# Altium PCB Zotino_HD68_Adapter.PCBDOC
Units mm, origin at the board's own origin, x right, y up, seen from the top; angles counter-clockwise.
Board outline 44.81 x 100 mm, 4 copper layers (TopLayer, Internal Plane 2, Signal Layer 1, BottomLayer), stack 1.563 mm thick; 5 components, 67 nets, 178 pads, 5 vias.
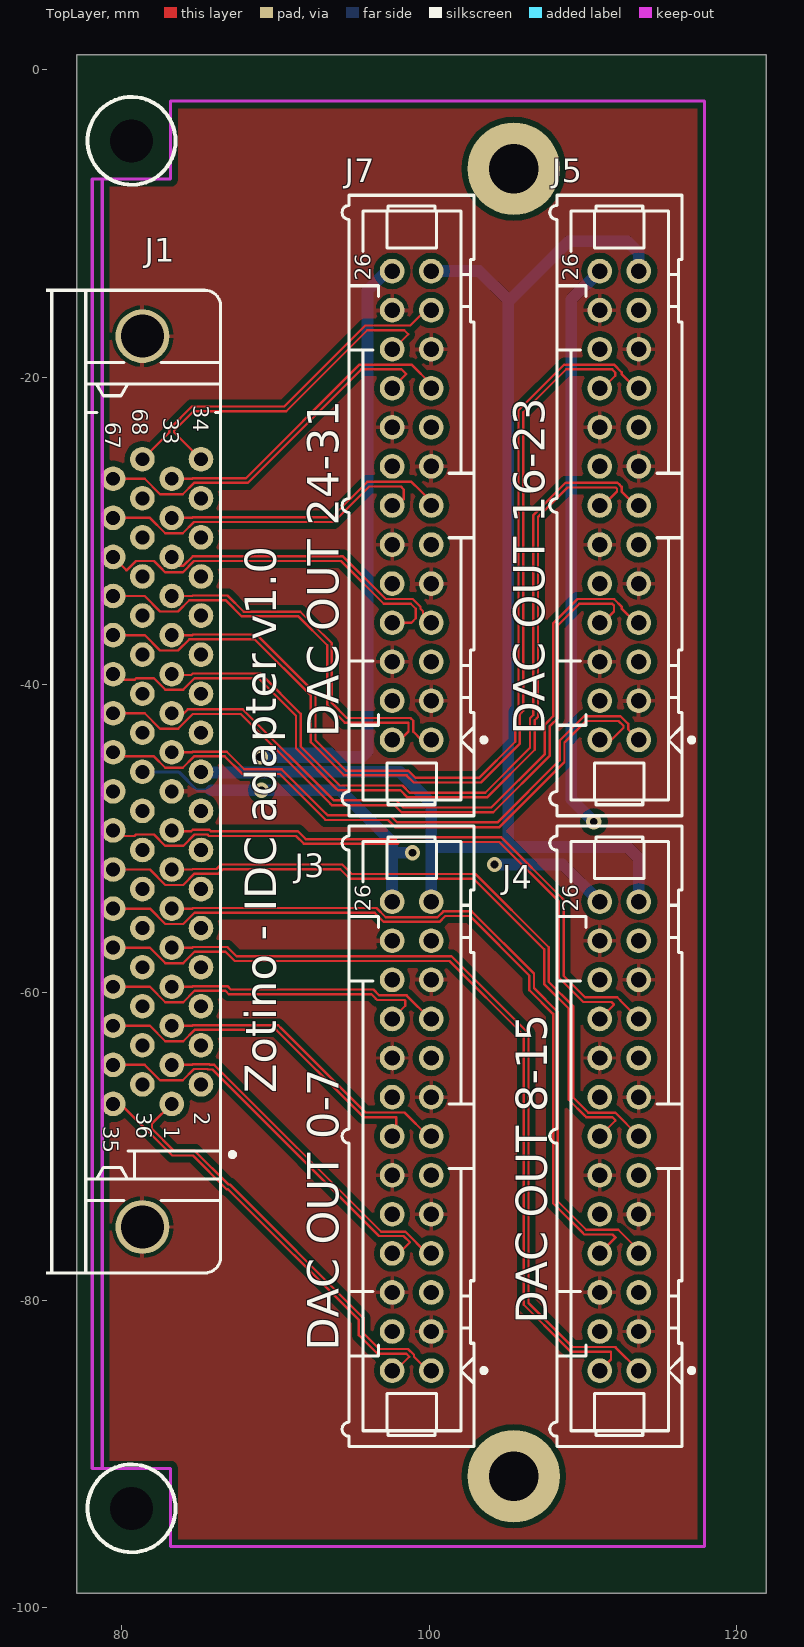
[diagram p0: TopLayer view]
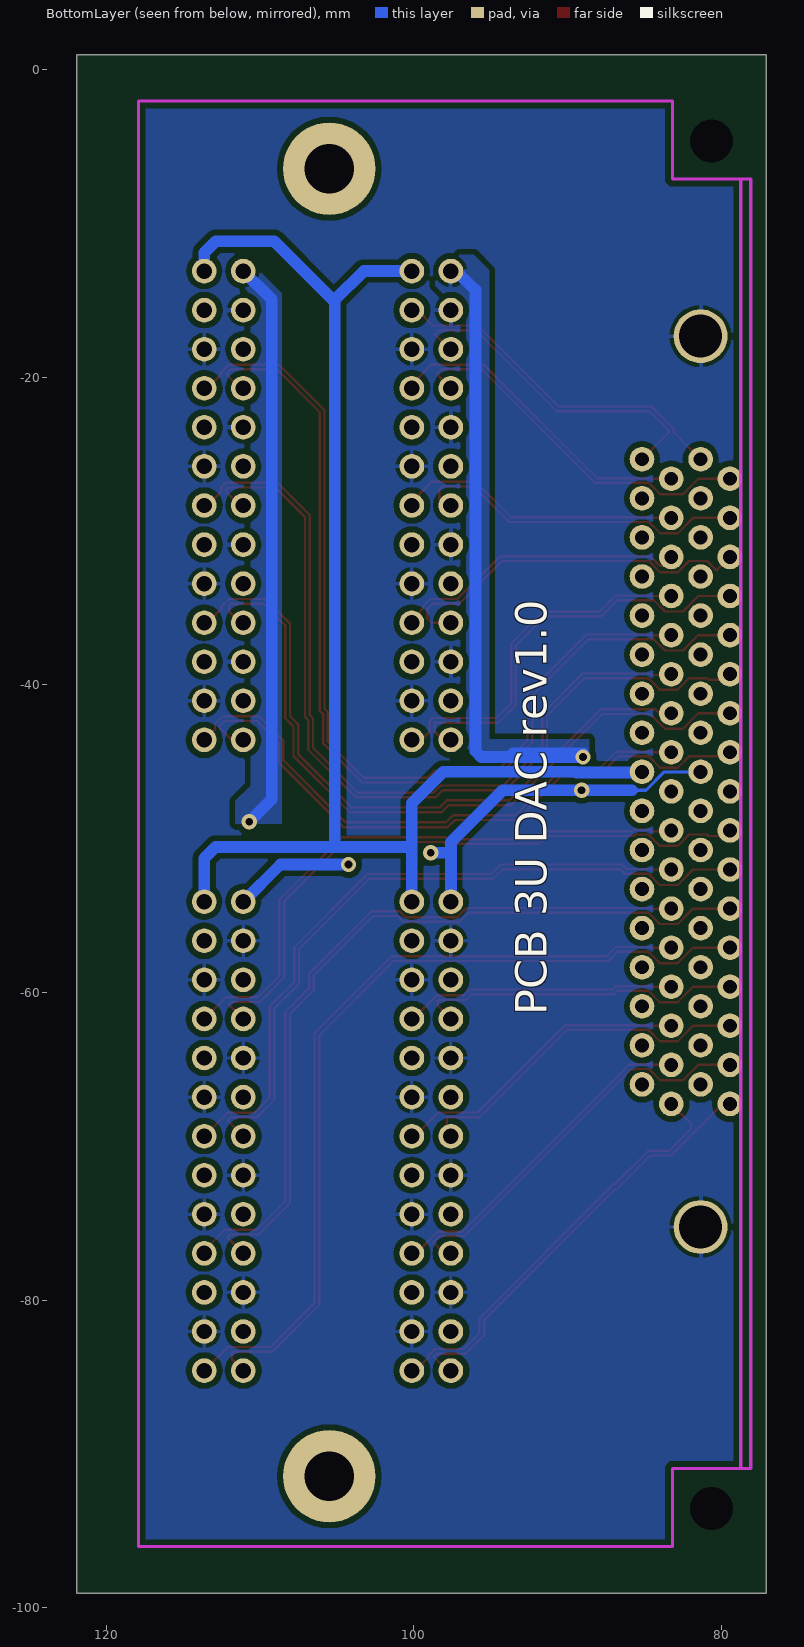
[diagram p1: BottomLayer view, seen from below]
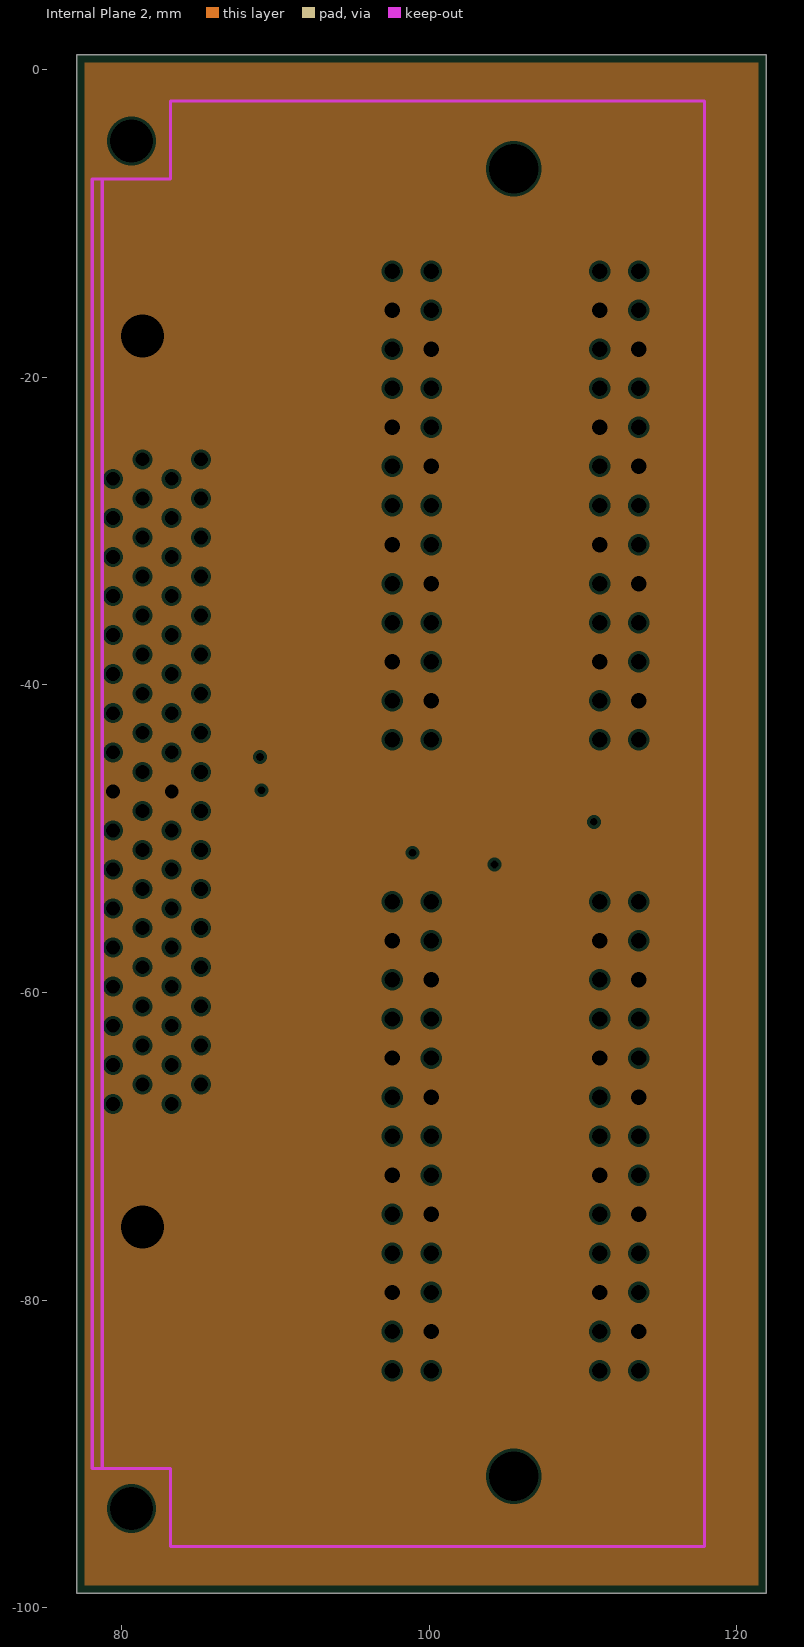
[diagram p2: Internal Plane 2, clearances drawn from the general rule]
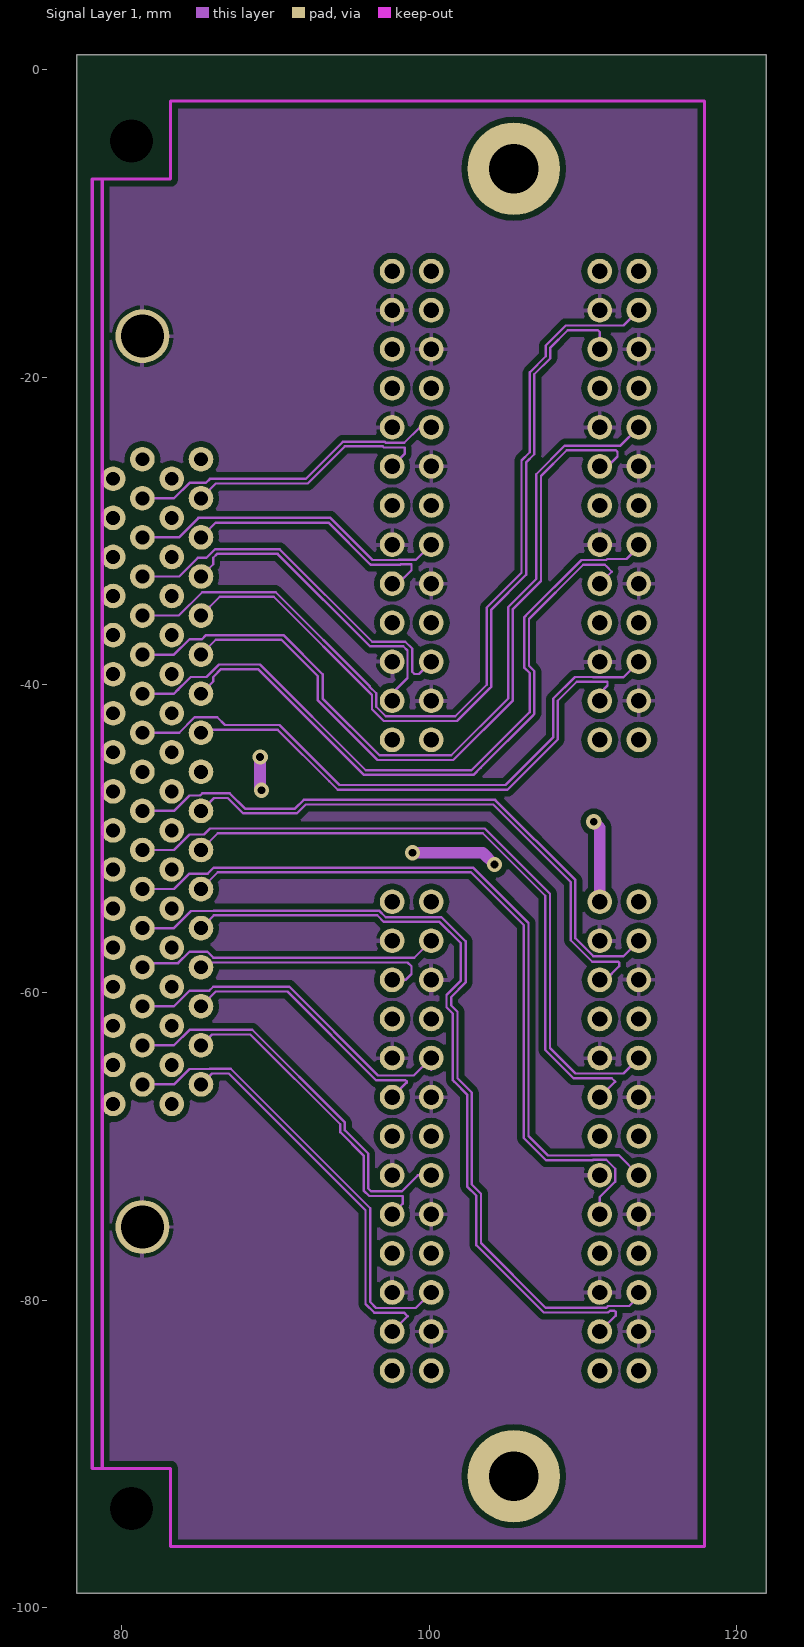
[diagram p3: Signal Layer 1]
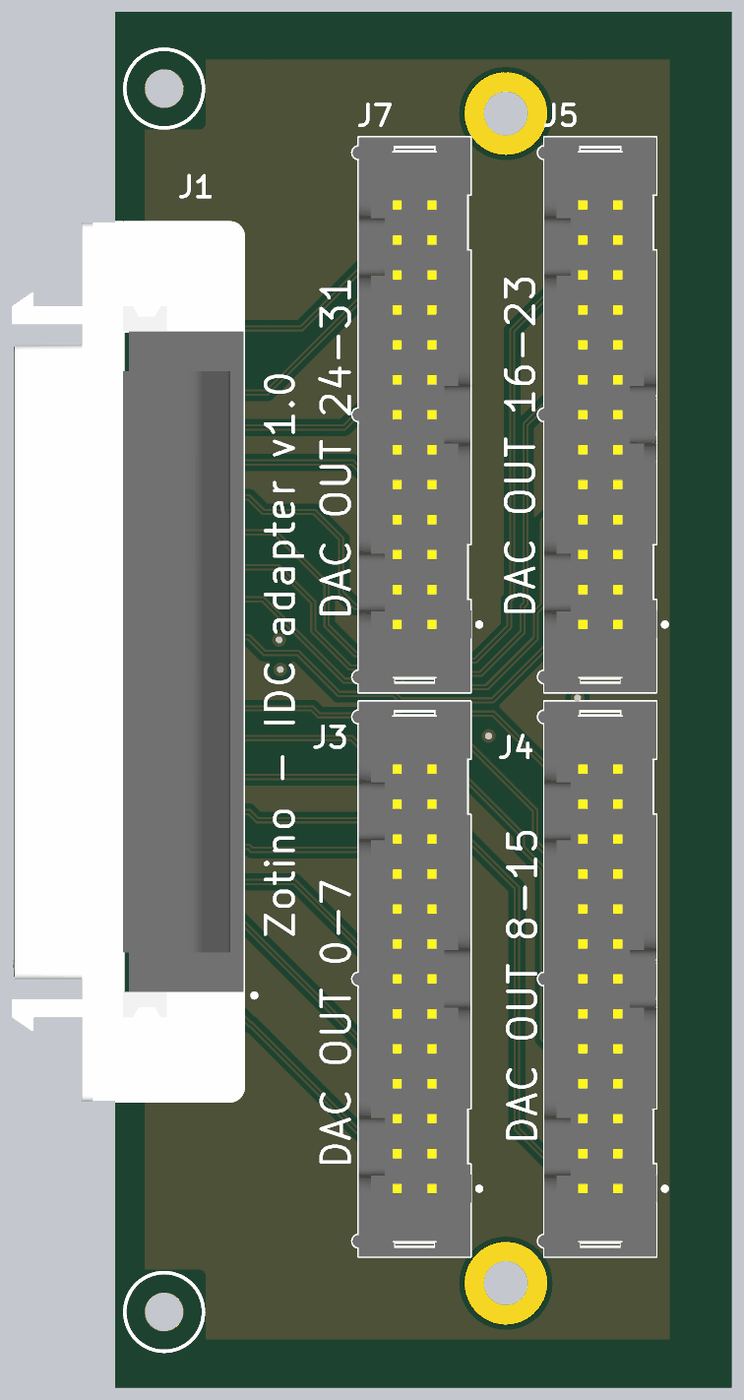
[diagram p4: 3D render of the assembled board from above, using the file's embedded part models]

## Layer stack, top to bottom
TopSolder: solder mask 0.0102, Solder Resist, Dk 3.5
TopLayer: signal copper 0.0356
Dielectric1: core 0.36, FR-4, Dk 4.8
Internal Plane 2: plane copper 0.036, net GND
Dielectric 3: prepreg 0.7, Dk 4.2
Signal Layer 1: signal copper 0.036
Dielectric 5: core 0.36, Dk 4.2
BottomLayer: signal copper 0.0356
BottomSolder: solder mask 0.0102, Solder Resist, Dk 3.5

## Board outline
121.912,0.955 121.912,-99.045 77.103,-99.045 77.103,0.955

## Design rules (kind name [scope] priority, off if disabled: settings)
Clearance Clearance_DIFF [(InDifferentialPairClass('All Differential Pairs')and IsTrack ) vs (InDifferentialPairClass('All Differential Pairs') and IsTrack  )] p1 off: gap=0.508 ignorepadtopadclearanceinfootprint=FALSE except(0: Arc-Hole Track-Hole SMDPad-Hole THPad-Hole Via-Hole Fill-Hole Poly-Hole Region-Hole Text-Hole; 0.127: SMDPad-SMDPad SMDPad-THPad SMDPad-Via SMDPad-Fill SMDPad-Poly SMDPad-Region SMDPad-Text THPad-THPad THPad-Via THPad-Fill THPad-Poly THPad-Region THPad-Text Via-Via Via-Fill Via-Poly Via-Region Via-Text)
Clearance [All] p2: gap=0.127 ignorepadtopadclearanceinfootprint=FALSE except(0: Arc-Hole Track-Hole SMDPad-Hole THPad-Hole Via-Hole Fill-Hole Poly-Hole Region-Hole Text-Hole; 0.381: Arc-Poly Track-Poly SMDPad-Poly THPad-Poly Via-Poly Fill-Poly Poly-Poly)
ComponentClearance [All] p1: gap=0 collisioncheckmode=3 verticalgap=2540 showdistances=FALSE
DiffPairsRouting [All] p1: maxlimit=0.152 minlimit=0.127 mostfreqgap=0.152 toplayer_minwidth=0.127 toplayer_maxwidth=0.152 toplayer_prefwidth=0.152 midlayer1_minwidth=0.127 midlayer1_maxwidth=0.152 midlayer1_prefwidth=0.152 bottomlayer_minwidth=0.127 bottomlayer_maxwidth=0.152 bottomlayer_prefwidth=0.152 maxuncoupledlength=12.7
FabricationTestPointUsage TestPointUsage [All] p1: valid=0 allowmultiple=FALSE
FabricationTestpoint Testpoint [All] p1: side=3 testpointundercomponent=TRUE minsize=1.016 maxsize=2.54 preferedsize=1.524 minholesize=0.508 maxholesize=1.016 preferedholesize=0.813 testpointgrid=0.025 allowsidetop=TRUE allowsidebottom=TRUE usegrid=TRUE gridtolerance=0
Height [All] p1: minheight=0 maxheight=40 prefheight=40
HoleSize [All] p1: absolutevalues=TRUE maxlimit=3.81 minlimit=0.025 maxpercent=80.000 minpercent=20.000
HoleToHoleClearance [All] p1: gap=0.025 allowstackedmicrovias=TRUE
MinimumSolderMaskSliver [All] p1: minsoldermaskwidth=0
PlaneClearance [All] p1: clearance=0.2
PlaneConnect [All] p1: planeconnectstyle=Direct reliefexpansion=0.508 reliefentries=4 reliefconductorwidth=0.254 reliefairgap=0.254
PolygonConnect PolygonConnect_pad [(InPadClass('All Pads'))] p1: connectstyle=Relief reliefconductorwidth=0.254 reliefentries=4 polygonreliefangle="90 Angle" airgapwidth=0.254
PolygonConnect [All] p2: connectstyle=Direct reliefconductorwidth=0.254 reliefentries=4 polygonreliefangle="45 Angle" airgapwidth=0.254
RoomDefinition Zotino_HD68_Adapter [InComponentClass('Zotino_HD68_Adapter')] p1: confinementstyle=ConfineIn formatcopy=TRUE lockcomponents=FALSE outline 120.912,0.705 118.412,0.705 118.412,-15.545 120.912,-15.545
RoutingVias [All] p1: holewidth=0.2 width=0.5 viastyle="Through Hole" minholewidth=0.2 minwidth=0.5 maxholewidth=0.711 maxwidth=1.27
SilkToSilkClearance [All] p1: silktosilkclearance=0
SilkToSolderMaskClearance SilkscreenOverComponentPads [IsPad] p1: minsilkscreentomaskgap=0 clearancetoexposedcopper=TRUE
SolderMaskExpansion [All] p1: expansion=0.051
ViasUnderSMD [All] p1: allowed=FALSE
Width [All] p1: maxlimit=1.27 minlimit=0.127 preferedwidth=0.127
18 further rules are at their usual default settings.

## Components (designator, comment, footprint, x,y, rotation, side; value= is the part's Value field where it differs from the comment)
J1 "D-SUB" TYCO_5787082-7 82.315,-46.289 r270 top
J3 "Header 26" 3M_N2526-6002RB 98.865,-69.339 r90 top
J4 "Header 26" 3M_N2526-6002RB 112.365,-69.339 r90 top
J5 "Header 26" 3M_N2526-6002RB 112.365,-28.339 r90 top
J7 "Header 26" 3M_N2526-6002RB 98.865,-28.339 r90 top

## Footprints (in the part's own frame and the unit in brackets; to place one, negate y for a bottom-side part, rotate by r counter-clockwise, add the part's x,y. Pads: shape width x height; smd on the part's side, far side on the other; paste and mask are expansions set on the pad)
3M_N2526-6002RB [mm] "26 Contacts - Straight .100\" x .100\" Low Profile Four-Wall Header"
  round 1.6 hole 1: 1(-15.24,-1.27) 2(-15.24,1.27) 3(-12.7,-1.27) 4(-12.7,1.27) 5(-10.16,-1.27) 6(-10.16,1.27) 7(-7.62,-1.27) 8(-7.62,1.27) 9(-5.08,-1.27) 10(-5.08,1.27) 11(-2.54,-1.27) 12(-2.54,1.27) 13(0,-1.27) 14(0,1.27) 15(2.54,-1.27) 16(2.54,1.27) 17(5.08,-1.27) 18(5.08,1.27) 19(7.62,-1.27) 20(7.62,1.27) 21(10.16,-1.27) 22(10.16,1.27) 23(12.7,-1.27) 24(12.7,1.27) 25(15.24,-1.27) 26(15.24,1.27)
  silkscreen extent -20.17,-4.85 20.17,4.52, body extent -20.17,-4.11 20.17,4.52, height 9.91
TYCO_5787082-7 [mm] "68 contacts, AMPLIMITE .050\", Right Angled Receptacle Series III"
  round 1.6 hole 0.9: 1(20.955,0.952) 2(19.685,2.858) 3(18.415,0.952) 4(17.145,2.858) 5(15.875,0.952) 6(14.605,2.858) 7(13.335,0.952) 8(12.065,2.858) 9(10.795,0.952) 10(9.525,2.858) 11(8.255,0.952) 12(6.985,2.858) 13(5.715,0.952) 14(4.445,2.858) 15(3.175,0.952) 16(1.905,2.858) 17(0.635,0.952) 18(-0.635,2.857) 19(-1.905,0.952) 20(-3.175,2.857) 21(-4.445,0.952) 22(-5.715,2.857) 23(-6.985,0.952) 24(-8.255,2.857) 25(-9.525,0.952) 26(-10.795,2.857) 27(-12.065,0.952) 28(-13.335,2.857) 29(-14.605,0.952) 30(-15.875,2.857) 31(-17.145,0.952) 32(-18.415,2.857) 33(-19.685,0.952) 34(-20.955,2.857) 35(20.955,-2.858) 36(19.685,-0.953) 37(18.415,-2.858) 38(17.145,-0.953) 39(15.875,-2.858) 40(14.605,-0.953) 41(13.335,-2.858) 42(12.065,-0.953) 43(10.795,-2.858) 44(9.525,-0.953) 45(8.255,-2.858) 46(6.985,-0.953) 47(5.715,-2.858) 48(4.445,-0.953) 49(3.175,-2.858) 50(1.905,-0.953) 51(0.635,-2.858) 52(-0.635,-0.953) 53(-1.905,-2.858) 54(-3.175,-0.953) 55(-4.445,-2.858) 56(-5.715,-0.953) 57(-6.985,-2.858) 58(-8.255,-0.953) 59(-9.525,-2.858) 60(-10.795,-0.953) 61(-12.065,-2.858) 62(-13.335,-0.953) 63(-14.605,-2.858) 64(-15.875,-0.953) 65(-17.145,-2.858) 66(-18.415,-0.953) 67(-19.685,-2.858) 68(-20.955,-0.953)
  round 3.5 hole 2.8: 69(-28.955,-0.953) 70(28.955,-0.952)
  silkscreen extent -31.94,-12.74 31.94,5.05, body extent -31.94,-12.74 31.94,4.13, height 9.5

## Part data
J1: library part TYCO_5787082-7, "68 contacts, AMPLIMITE .050\", Right Angled Receptacle Series III", Manufacturer="TYCO ELECTRONICS", Manufacturer Part Number=5787082-7, Author="CERN DEM JLC", ComponentHeight=9.5mm, Component Type=Standard, CreateDate=13.03.2017, Family=D-SUB, HelpURL=\\cern.ch\dfs\Applications\Altium\Datasheets\TYCO_5787082-7.pdf, LatestRevisionDate=13.03.2017, Mounted=Yes, Part Description="68 contacts, AMPLIMITE .050\", Right Angled Receptacle Series III", Part Number=TYCO_5787082-7, Pin Count=70, PressFit=No, Sense=No, SMD=No, Socket=No, Status=None
J3 J4 J5 J7: library part 3M_N2526-6002RB, "Connector 26 Male", Manufacturer=3M, Manufacturer Part Number=N2526-6002RB, Author="CERN DEM JLC", ComponentHeight=10.03mm, Component Type=Standard, CreateDate=11.02.2009, Family="Header 26", HelpURL=\\cern.ch\dfs\Applications\Altium\Datasheets\3M_N2526-6002RB.pdf, LatestRevisionDate=11.08.2009, Mounted=Yes, Part Description="26 Contacts - Straight .100'' x .100'' Low Profile Four-Wall Header, 2500 Series", Part Number=3M_N2526-6002RB, Pin Count=26, PressFit=No, Sense=No, SMD=No, Socket=No, Status=None

## Free pads (board coordinates)
  round 1.27 hole 2.794: 1(80.659,-4.633) 2(80.659,-93.533)
  round 6 hole 3.2: 2(105.503,-6.445) 3(105.503,-91.445)

## Via types
v1: diameter 1, hole 0.5, TopLayer to BottomLayer, tented both sides, 5 vias

## Nets (pads, with @x,y where several pads share a name; then routed paths per layer and width w, separated by ;. In a path a pad name is that pad's centre, name@x,y a point inside that pad or via, vN(x,y) a via of type N, cw(c..) or ccw(c..) an arc to the next point about the centre after c; other vN are vias at no path point)
DAC_OUT_N1: J1.35 J3.2 | length 28.1
  TopLayer w0.152: J1.35 79.94,-67.244 83.296,-70.6 84.643,-70.6 86.834,-72.791 86.928,-72.791 95.437,-81.3 95.437,-82.283 96.632,-83.477 98.509,-83.477 98.713,-83.681 97.815,-84.579 J3.2
DAC_OUT_N2: J1.36 J3.5 | length 29.6
  Signal Layer 1 w0.152: J1.36 83.416,-65.974 84.42,-64.971 85.74,-64.971 85.75,-64.961 87.105,-64.961 96.174,-74.029 96.174,-80.125 96.555,-80.506 99.128,-80.506 J3.5
DAC_OUT_N3: J1.37 J3.8 | length 26.1
  TopLayer w0.152: J1.37 81.511,-64.704 82.515,-65.707 83.985,-65.707 84.721,-64.971 85.25,-64.971 85.588,-64.97 85.626,-65.008 85.91,-65.008 96.734,-75.832 98.344,-75.832 98.75,-76.239 98.03,-76.959 J3.8
DAC_OUT_N4: J1.38 J3.11 | length 25.6
  Signal Layer 1 w0.152: J1.38 83.416,-63.434 84.42,-62.431 85.49,-62.431 85.5,-62.421 88.502,-62.421 94.523,-68.441 94.523,-68.949 96.047,-70.473 96.047,-72.739 96.236,-72.928 98.22,-72.928 99.269,-71.879 J3.11
DAC_OUT_N5: J1.39 J3.14 | length 22.4
  TopLayer w0.152: J1.39 81.849,-62.164 82.852,-63.167 84.021,-63.167 84.757,-62.43 90.063,-62.43 95.273,-67.64 95.739,-68.107 97.854,-68.107 J3.14@97.854,-69.08
DAC_OUT_N6: J1.40 J3.17 | length 22.9
  Signal Layer 1 w0.152: J1.40 83.416,-60.894 84.42,-59.891 85,-59.891 85.7,-59.89 85.964,-59.627 90.915,-59.627 96.681,-65.393 99.001,-65.393 J3.17 J3.17@100.135,-65.012
DAC_OUT_N7: J1.41 J3.20 | length 21.5
  TopLayer w0.152: J1.41 81.849,-59.624 82.852,-60.627 84.021,-60.627 84.757,-59.89 86.761,-59.89 86.98,-60.109 96.251,-60.109 96.543,-60.401 96.632,-60.49 98.41,-60.49 98.448,-60.528 98.448,-60.866 J3.20
DAC_OUT_N8: J1.42 J3.23 | length 20.3
  Signal Layer 1 w0.152: J1.42 81.63,-58.087 83.683,-58.087 84.42,-57.35 85.588,-57.35 85.978,-57.74 99.034,-57.74 J3.23
  BottomLayer w0.152: J3.23@100.135,-57.162 J3.23
DAC_OUT_N9: J1.43 J4.2 | length 55.7
  TopLayer w0.152: J1.43 81.849,-57.084 82.852,-58.087 84.021,-58.087 84.757,-57.35 86.761,-57.35 87.361,-57.95 101.33,-57.95 106.156,-62.776 106.156,-80.302 108.735,-82.88 109.201,-83.347 111.824,-83.347 111.824,-83.85 J4.2
DAC_OUT_N10: J1.44 J4.5 | length 56.4
  TopLayer w0.152: J4.5 J4.5@113.635,-78.819
  Signal Layer 1 w0.152: J1.44 83.416,-55.814 84.531,-54.699 85.975,-54.699 86,-54.674 96.752,-54.674 97.18,-55.102 100.803,-55.102 102.373,-56.672 102.373,-59.352 101.436,-60.289 101.436,-60.836 101.851,-61.251 101.851,-65.577 101.94,-65.666 102.778,-66.504 102.778,-72.482 103.373,-73.077 103.373,-76.294 107.581,-80.502 111.511,-80.502 111.634,-80.379 113.014,-80.379 113.635,-79.758 J4.5
DAC_OUT_N11: J1.45 J4.8 | length 51.7
  TopLayer w0.152: J1.45 81.849,-54.544 82.852,-55.547 84.021,-55.547 84.757,-54.81 96.457,-54.81 97.053,-55.407 100.677,-55.407 101.054,-55.029 102.651,-55.029 106.512,-58.89 106.512,-59.842 108.061,-61.392 108.061,-73.698 109.967,-75.603 110.09,-75.727 111.923,-75.727 112.125,-75.929 J4.8
DAC_OUT_N12: J1.46 J4.11 | length 49.3
  Signal Layer 1 w0.152: J1.46 83.416,-53.274 84.42,-52.271 85.609,-52.271 86,-51.88 102.853,-51.88 106.461,-55.487 106.461,-69.33 107.731,-70.6 110.524,-70.6 110.553,-70.571 112.327,-70.571 J4.11
DAC_OUT_N13: J1.47 J4.14 | length 46.5
  TopLayer w0.152: J1.47 81.849,-52.004 82.852,-53.007 84.021,-53.007 84.757,-52.27 86.308,-52.27 86.597,-51.981 94.226,-51.981 94.845,-52.6 102.888,-52.6 107.477,-57.188 107.477,-59.442 109.077,-61.043 109.077,-66.967 110.132,-68.021 110.221,-68.11 111.918,-68.11 112.103,-68.295 112.103,-68.331 J4.14
DAC_OUT_N14: J1.48 J4.17 | length 45.7
  Signal Layer 1 w0.152: J1.48 83.416,-50.734 84.42,-49.731 85.359,-49.731 85.75,-49.34 103.615,-49.34 107.858,-53.582 107.858,-63.615 109.509,-65.266 112.628,-65.266 J4.17
DAC_OUT_N15: J1.49 J4.20 | length 42.3
  TopLayer w0.152: J1.49 79.817,-49.822 80.855,-49.822 80.947,-49.73 82.116,-49.73 82.852,-50.467 84.021,-50.467 84.757,-49.73 85.588,-49.73 85.68,-49.822 91.349,-49.822 91.857,-50.33 97.959,-50.33 98.078,-50.211 104.564,-50.211 108.442,-54.09 108.442,-59.043 110.017,-60.617 111.853,-60.617 112.019,-60.784 112.019,-60.795 J4.20
DAC_OUT_N16: J1.50 J4.23 | length 40.2
  Signal Layer 1 w0.152: J1.50 83.416,-48.194 84.42,-47.191 85.113,-47.191 85.25,-47.054 87.043,-47.054 88.034,-48.045 91.285,-48.045 91.853,-47.477 104.293,-47.477 109.509,-52.693 109.509,-56.471 110.68,-57.642 112.632,-57.642 J4.23
DAC_OUT_N17: J1.53 J5.2 | length 41.5
  TopLayer w0.152: J1.53 79.725,-44.65 82.116,-44.65 82.852,-45.387 83.985,-45.387 84.721,-44.65 86.717,-44.65 87.861,-45.795 90.287,-45.795 93.184,-48.692 93.274,-48.781 97.338,-48.781 97.803,-49.246 104.572,-49.246 108.798,-45.02 108.798,-43.751 110.202,-42.347 112.32,-42.347 112.633,-42.66 112.633,-42.787 111.841,-43.579 J5.2
DAC_OUT_N18: J1.54 J5.5 | length 40
  Signal Layer 1 w0.152: J1.54 83.754,-43.114 84.757,-42.11 86.226,-42.11 86.724,-42.609 90.28,-42.609 90.37,-42.698 94.184,-46.512 104.971,-46.512 108.061,-43.422 108.061,-40.905 109.476,-39.49 110.668,-39.49 110.68,-39.502 112.632,-39.502 J5.5 J5.5@113.635,-39.217
DAC_OUT_N19: J1.55 J5.8 | length 47.9
  TopLayer w0.152: J1.55 81.511,-41.844 82.515,-42.847 83.683,-42.847 84.633,-41.898 87.755,-41.898 93.584,-47.727 93.673,-47.816 97.737,-47.816 98.202,-48.281 104.172,-48.281 107.833,-44.62 107.833,-42.697 107.96,-42.57 108.366,-42.164 108.366,-36.132 109.771,-34.727 111.9,-34.727 112.017,-34.844 112.017,-35.235 111.294,-35.959 J5.8
DAC_OUT_N20: J1.56 J5.11 | length 46.7
  Signal Layer 1 w0.152: J1.56 83.416,-40.574 83.683,-40.307 84.271,-39.719 84.505,-39.485 85.532,-39.485 86.345,-38.672 89.01,-38.672 95.886,-45.547 102.761,-45.547 106.537,-41.771 106.537,-39.231 106.283,-38.977 106.194,-38.887 106.194,-35.587 106.283,-35.498 109.899,-31.882 111.511,-31.882 111.579,-31.814 112.834,-31.814 J5.11@113.635,-31.012 ; J5.11@113.635,-31.569 J5.11@113.635,-31.012 ; J5.11 J5.11@113.635,-31.012
DAC_OUT_N21: J1.57 J5.14 | length 57
  TopLayer w0.152: J1.57 79.817,-39.662 80.855,-39.662 80.947,-39.57 82.116,-39.57 82.265,-39.719 82.852,-40.307 83.683,-40.307 84.021,-40.307 84.757,-39.57 88.907,-39.57 91.348,-42.011 91.348,-44.126 93.984,-46.761 94.073,-46.851 98.137,-46.851 98.602,-47.316 103.772,-47.316 106.867,-44.22 106.867,-42.297 106.994,-42.17 107.084,-42.081 107.084,-29.082 109,-27.166 112.125,-27.166 112.213,-27.253 112.213,-27.42 111.294,-28.339 J5.14
  Signal Layer 1 w0.152: J5.14 J5.14@111.095,-28.106
DAC_OUT_N22: J1.58 J5.17 | length 53.3
  Signal Layer 1 w0.152: J1.58 83.416,-38.034 84.42,-37.031 85.236,-37.031 85.5,-36.767 90.534,-36.767 93.075,-39.308 93.075,-40.882 96.775,-44.582 101.44,-44.582 105.14,-40.882 105.14,-34.944 106.969,-33.115 106.969,-26.303 108.824,-24.448 112.446,-24.448 J5.17
DAC_OUT_N23: J1.59 J5.20 | length 64.3
  TopLayer w0.152: J1.59 81.511,-36.764 82.515,-37.767 83.683,-37.767 84.407,-37.043 84.709,-37.043 84.721,-37.031 85.75,-37.031 88.657,-37.03 92.313,-40.686 92.313,-43.726 94.384,-45.796 94.473,-45.885 98.537,-45.885 99.002,-46.351 103.372,-46.351 105.902,-43.821 105.902,-41.898 106.029,-41.771 106.118,-41.681 106.118,-22.279 108.911,-19.487 111.9,-19.487 112.103,-19.69 112.103,-19.91 111.294,-20.719 J5.20
DAC_OUT_N24: J1.60 J5.23 | length 58.4
  Signal Layer 1 w0.152: J1.60 83.729,-35.494 85.25,-33.973 90.026,-33.973 96.152,-40.098 ; 96.134,-40.116 96.566,-40.549 96.566,-41.429 97.18,-42.042 101.694,-42.042 103.743,-39.993 103.743,-34.976 106.004,-32.715 106.004,-25.412 106.537,-24.879 106.537,-19.684 107.579,-18.642 107.579,-17.946 108.883,-16.642 112.632,-16.642 J5.23
DAC_OUT_N25: J1.61 J7.2 | length 27.5
  TopLayer w0.152: J1.61 81.511,-34.224 82.515,-35.227 83.683,-35.227 84.407,-34.503 84.709,-34.503 84.721,-34.491 85.25,-34.491 86.763,-34.49 87.821,-35.548 91.501,-35.548 93.374,-37.42 93.374,-41.307 94.523,-42.456 98.663,-42.456 98.663,-43.041 98.125,-43.579 J7.2 J7.2@97.71,-43.579
DAC_OUT_N26: J1.62 J7.5 | length 24.1
  Signal Layer 1 w0.152: J1.62 83.754,-32.954 84.97,-31.738 85.532,-31.738 86.091,-31.179 90.28,-31.179 96.3,-37.199 97.045,-37.199 97.053,-37.191 98.451,-37.191 98.903,-37.643 98.903,-39.141 99.057,-39.295 99.339,-39.295 J7.5
DAC_OUT_N27: J1.63 J7.8 | length 24.4
  TopLayer w0.152: J1.63 80.312,-32.538 80.359,-32.538 80.947,-31.95 82.116,-31.95 82.5,-32.335 82.852,-32.687 83.985,-32.687 84.721,-31.95 94.277,-31.95 97.053,-34.727 98.807,-34.727 99.132,-35.051 99.132,-35.675 98.848,-35.959 J7.8
DAC_OUT_N28: J1.64 J7.11 | length 21.2
  TopLayer w0.152: J7.11@100.135,-31.054 100.078,-31.054 100.019,-30.995 J7.11
  Signal Layer 1 w0.152: J1.64 83.733,-30.414 85,-29.147 93.582,-29.147 96.317,-31.882 98.011,-31.882 98.028,-31.865 99.149,-31.865 J7.11
DAC_OUT_N29: J1.65 J7.14 | length 22.6
  TopLayer w0.152: J1.65 81.849,-29.144 82.852,-30.147 83.985,-30.147 84.721,-29.41 93.802,-29.41 96.105,-27.107 98.164,-27.107 98.353,-27.295 98.353,-27.933 97.947,-28.339 J7.14
  Signal Layer 1 w0.152: J7.14 J7.14@97.947,-28.339
DAC_OUT_N30: J1.66 J7.17 | length 20.7
  Signal Layer 1 w0.152: J1.66 83.416,-27.874 84.42,-26.871 85.486,-26.871 85.75,-26.607 91.983,-26.607 94.396,-24.194 97.112,-24.194 97.18,-24.262 98.386,-24.262 99.389,-23.259 J7.17 J7.17@100.135,-23.262
DAC_OUT_N31: J1.67 J7.20 | length 24.5
  TopLayer w0.152: J1.67 81.511,-26.604 82.515,-27.607 83.985,-27.607 84.721,-26.871 85.25,-26.871 88.214,-26.87 95.597,-19.487 98.211,-19.487 98.519,-19.795 J7.20
  Signal Layer 1 w0.152: J7.20 J7.20@97.821,-20.719
DAC_OUT_N32: J1.68 J7.23 | length 23.3
  TopLayer w0.152: J1.68 83.115,-23.581 83.115,-23.356 84.564,-21.908 90.586,-21.908 95.852,-16.642 98.773,-16.642 99.776,-15.639 J7.23
  Signal Layer 1 w0.152: J7.23@99.759,-15.639 J7.23
DAC_OUT_P1: J1.1 J3.1 | length 27.5
  TopLayer w0.152: J1.1 81.988,-68.524 81.988,-68.86 83.422,-70.295 84.769,-70.295 86.961,-72.486 87.055,-72.486 95.742,-81.173 95.742,-82.157 96.758,-83.173 98.636,-83.173 99.017,-83.554 99.017,-83.681 99.915,-84.579 J3.1
DAC_OUT_P2: J1.2 J3.4 | length 25.2
  Signal Layer 1 w0.152: J1.2 85.881,-65.266 86.979,-65.266 95.869,-74.156 95.869,-80.251 96.429,-80.81 98.368,-80.81 98.603,-81.045 97.609,-82.039 J3.4
DAC_OUT_P3: J1.3 J3.7 | length 21.8
  TopLayer w0.152: J1.3 84.593,-64.704 84.631,-64.666 85.714,-64.666 85.752,-64.704 86.036,-64.704 96.885,-75.553 98.459,-75.553 J3.7@99.865,-76.959 ; J3.7@100.135,-77.068 J3.7
DAC_OUT_P4: J1.4 J3.10 | length 21.5
  Signal Layer 1 w0.152: J1.4 85.881,-62.726 88.376,-62.726 94.218,-68.568 94.218,-69.075 95.742,-70.599 95.742,-72.865 96.109,-73.233 98.29,-73.233 98.29,-73.723 J3.10 J3.10@98.229,-74.419
DAC_OUT_P5: J1.5 J3.13 | length 19.9
  TopLayer w0.152: J1.5 84.593,-62.164 84.631,-62.126 90.189,-62.126 90.408,-62.345 95.865,-67.802 98.405,-67.802 99.942,-69.339 J3.13 J3.13@100.135,-69.403
DAC_OUT_P6: J1.6 J3.16 | length 17.9
  Signal Layer 1 w0.152: J1.6 86.135,-59.932 90.789,-59.932 96.555,-65.697 98.46,-65.697 98.536,-65.774 98.536,-65.858 J3.16 J3.16@97.78,-66.614
DAC_OUT_P7: J1.7 J3.19 | length 17.8
  TopLayer w0.152: J1.7 84.593,-59.624 84.631,-59.586 86.887,-59.586 87.106,-59.805 96.377,-59.805 96.758,-60.186 98.536,-60.186 100.069,-61.719 J3.19
DAC_OUT_P8: J1.8 J3.22 | length 15.8
  Signal Layer 1 w0.152: J1.8 85.481,-58.045 98.603,-58.045 98.853,-58.295 98.853,-58.795 98.469,-59.179 J3.22
DAC_OUT_P9: J1.9 J4.1 | length 52.1
  TopLayer w0.152: J1.9 84.593,-57.084 84.631,-57.046 86.887,-57.046 86.925,-57.084 87.487,-57.646 101.456,-57.646 106.461,-62.65 106.461,-80.175 109.327,-83.042 112.121,-83.042 112.125,-83.046 112.125,-83.069 J4.1
DAC_OUT_P10: J1.10 J4.4 | length 51.5
  Signal Layer 1 w0.152: J1.10 86.008,-54.979 96.625,-54.979 97.053,-55.407 100.677,-55.407 102.069,-56.798 102.069,-59.225 101.131,-60.163 101.131,-60.962 101.546,-61.377 101.546,-65.703 101.635,-65.792 102.473,-66.631 102.473,-72.608 103.069,-73.204 103.069,-76.42 107.455,-80.807 111.637,-80.807 111.76,-80.683 112.049,-80.683 112.125,-80.76 112.125,-81.009 J4.4
DAC_OUT_P11: J1.11 J4.7 | length 47.9
  TopLayer w0.152: J1.11 84.593,-54.544 84.631,-54.506 96.583,-54.506 97.18,-55.102 100.551,-55.102 100.928,-54.725 102.777,-54.725 106.817,-58.764 106.817,-59.716 108.366,-61.265 108.366,-73.571 110.216,-75.422 112.298,-75.422 113.635,-76.759 J4.7
DAC_OUT_P12: J1.12 J4.10 | length 46.9
  Signal Layer 1 w0.152: J1.12 86.262,-52.185 102.727,-52.185 106.156,-55.614 106.156,-69.456 107.605,-70.904 110.65,-70.904 110.679,-70.875 111.511,-70.875 112.098,-71.463 112.098,-72.294 111.095,-73.297 J4.10
DAC_OUT_P13: J1.13 J4.13 | length 42.6
  TopLayer w0.152: J1.13 84.593,-52.004 84.631,-51.966 86.182,-51.966 86.471,-51.677 94.353,-51.677 94.971,-52.295 103.014,-52.295 107.782,-57.062 107.782,-59.316 109.382,-60.916 109.382,-66.84 110.347,-67.806 112.102,-67.806 J4.13
DAC_OUT_P14: J1.14 J4.16 | length 41.4
  Signal Layer 1 w0.152: J1.14 86.262,-49.645 103.489,-49.645 107.553,-53.709 107.553,-63.741 109.383,-65.57 111.878,-65.57 112.103,-65.795 111.099,-66.799 J4.16
DAC_OUT_P15: J1.15 J4.19 | length 39.9
  TopLayer w0.152: J1.15 83.322,-49.518 84.539,-49.518 84.631,-49.426 85.714,-49.426 85.806,-49.518 91.476,-49.518 91.984,-50.026 97.833,-50.026 97.952,-49.907 104.69,-49.907 104.768,-49.984 108.658,-53.874 108.747,-53.963 108.747,-58.916 110.143,-60.313 112.229,-60.313 J4.19@113.211,-61.295 ; 112.43,-60.514 J4.19@113.211,-61.295 ; J4.19 J4.19@113.211,-61.295
  Signal Layer 1 w0.152: J4.19@113.338,-61.719 J4.19
DAC_OUT_P16: J1.16 J4.22 | length 36.5
  Signal Layer 1 w0.152: J1.16 86.008,-47.359 86.916,-47.359 87.907,-48.35 91.412,-48.35 91.979,-47.782 104.167,-47.782 109.204,-52.82 109.204,-56.598 110.603,-57.996 112.304,-57.996 112.353,-58.045 112.353,-58.295 111.469,-59.179 J4.22
DAC_OUT_P17: J1.19 J5.1 | length 37.1
  TopLayer w0.152: J1.19 84.593,-44.384 84.631,-44.346 86.843,-44.346 87.988,-45.49 90.414,-45.49 93.311,-48.387 93.4,-48.476 97.464,-48.476 97.929,-48.941 104.445,-48.941 108.493,-44.894 108.493,-43.625 110.076,-42.042 112.446,-42.042 112.938,-42.533 112.938,-42.882 J5.1
  Signal Layer 1 w0.152: J5.1@113.29,-43.579 J5.1
DAC_OUT_P18: J1.20 J5.4 | length 34
  Signal Layer 1 w0.152: J1.20 85.373,-42.914 90.154,-42.914 93.507,-46.266 94.058,-46.817 105.097,-46.817 105.647,-46.266 108.366,-43.548 108.366,-41.032 109.603,-39.795 110.541,-39.795 110.553,-39.807 111.603,-39.807 111.603,-40.045 111.095,-40.552 J5.4
DAC_OUT_P19: J1.21 J5.7 | length 44.1
  TopLayer w0.152: J1.21 84.059,-41.844 84.31,-41.593 87.881,-41.593 93.71,-47.422 93.8,-47.511 97.864,-47.511 98.329,-47.976 104.046,-47.976 107.528,-44.494 107.528,-42.571 107.655,-42.444 108.061,-42.038 108.061,-36.006 109.645,-34.422 112.026,-34.422 112.038,-34.434 112.517,-34.913 112.517,-35.04 113.436,-35.959 J5.7
DAC_OUT_P20: J1.22 J5.10 | length 41.4
  Signal Layer 1 w0.152: J1.22 85.963,-39.783 85.963,-39.485 86.471,-38.977 88.884,-38.977 95.285,-45.377 95.759,-45.852 102.887,-45.852 103.361,-45.377 106.753,-41.986 106.842,-41.897 106.842,-39.104 106.753,-39.015 106.499,-38.761 106.499,-35.713 110.025,-32.187 111.42,-32.187 111.529,-32.295 111.874,-32.64 J5.10
DAC_OUT_P21: J1.23 J5.13 | length 52.7
  TopLayer w0.152: J1.23 83.322,-39.358 84.539,-39.358 84.631,-39.266 89.033,-39.266 91.653,-41.885 91.653,-43.999 94.11,-46.457 94.199,-46.546 98.263,-46.546 98.729,-47.011 103.646,-47.011 106.563,-44.094 106.563,-42.171 106.69,-42.044 106.779,-41.955 106.779,-28.956 108.874,-26.861 112.251,-26.861 112.341,-26.95 112.517,-27.127 112.517,-27.42 113.436,-28.339 J5.13
DAC_OUT_P22: J1.24 J5.16 | length 49.7
  TopLayer w0.152: J5.16 J5.16@111.599,-25.799
  Signal Layer 1 w0.152: J1.24 86.135,-37.072 90.408,-37.072 92.77,-39.434 92.77,-41.008 96.649,-44.887 101.566,-44.887 105.445,-41.008 105.445,-35.07 107.274,-33.241 107.274,-26.429 108.95,-24.753 112.141,-24.753 112.252,-24.864 112.252,-25.145 111.599,-25.799 J5.16
DAC_OUT_P23: J1.25 J5.19 | length 60.4
  TopLayer w0.152: J1.25 84.593,-36.764 84.631,-36.726 88.783,-36.726 92.618,-40.56 92.618,-43.599 94.599,-45.581 98.663,-45.581 99.128,-46.046 103.246,-46.046 105.597,-43.694 105.597,-41.771 105.814,-41.555 105.814,-22.153 108.785,-19.182 112.026,-19.182 112.517,-19.673 112.517,-19.8 113.436,-20.719 J5.19
DAC_OUT_P24: J1.26 J5.22 | length 52.7
  Signal Layer 1 w0.152: J1.26 86.389,-34.278 89.9,-34.278 96.287,-40.665 96.287,-41.58 97.053,-42.347 101.82,-42.347 103.959,-40.208 104.048,-40.119 104.048,-35.102 106.309,-32.841 106.309,-25.538 106.842,-25.005 106.842,-19.81 107.883,-18.769 107.883,-18.072 109.009,-16.947 110.982,-16.947 111.095,-17.06 J5.22
DAC_OUT_P25: J1.27 J7.1 | length 23.6
  TopLayer w0.152: J1.27 84.593,-34.224 84.631,-34.186 86.889,-34.186 87.947,-35.243 91.627,-35.243 92.44,-36.056 93.679,-37.294 93.679,-41.181 94.649,-42.152 98.789,-42.152 98.968,-42.33 98.968,-43.041 99.506,-43.579 J7.1 J7.1@100.021,-43.579
DAC_OUT_P26: J1.28 J7.4 | length 20.8
  Signal Layer 1 w0.152: J1.28 85.963,-32.163 85.963,-31.738 86.217,-31.484 90.154,-31.484 96.174,-37.503 96.182,-37.495 98.325,-37.495 98.598,-37.769 98.598,-39.549 97.595,-40.552 J7.4 J7.4@97.859,-41.039
DAC_OUT_P27: J1.29 J7.7 | length 19.9
  TopLayer w0.152: J1.29 83.83,-32.246 84.031,-32.246 84.631,-31.646 94.403,-31.646 97.18,-34.422 98.934,-34.422 99.437,-34.925 99.437,-35.051 99.603,-35.217 99.603,-35.675 99.887,-35.959 J7.7
  Signal Layer 1 w0.152: J7.7@99.851,-35.675 J7.7
DAC_OUT_P28: J1.30 J7.10 | length 17.2
  Signal Layer 1 w0.152: J1.30 86.135,-29.452 93.456,-29.452 96.174,-32.169 96.191,-32.187 98.137,-32.187 98.154,-32.169 98.853,-32.169 98.853,-32.545 97.979,-33.419 J7.10
DAC_OUT_P29: J1.31 J7.13 | length 19.2
  TopLayer w0.152: J1.31 84.593,-29.144 84.631,-29.106 93.675,-29.106 95.979,-26.802 98.857,-26.802 99.386,-27.331 100.135,-28.079 J7.13
  Signal Layer 1 w0.152: J7.13@99.582,-28.339 J7.13
DAC_OUT_P30: J1.32 J7.16 | length 16.2
  Signal Layer 1 w0.152: J1.32 86.135,-26.912 92.109,-26.912 94.522,-24.499 96.985,-24.499 97.053,-24.567 98.409,-24.567 98.409,-24.985 J7.16
DAC_OUT_P31: J1.33 J7.19 | length 21.4
  TopLayer w0.152: J1.33 84.593,-26.604 84.631,-26.566 88.087,-26.566 95.471,-19.182 98.857,-19.182 100.135,-20.459 J7.19
  Signal Layer 1 w0.152: J7.19@99.455,-20.719 J7.19
DAC_OUT_P32: J1.34 J7.22 | length 22.1
  TopLayer w0.152: J1.34 83.42,-23.581 83.42,-23.483 84.69,-22.213 90.712,-22.213 95.978,-16.947 98.378,-16.947 98.639,-17.207 97.667,-18.179 J7.22
GND: J1.17 J1.51 J1.69 J1.70 J3.3 J3.6 J3.9 J3.12 J3.15 J3.18 J3.21 J3.24 J4.3 J4.6 J4.9 J4.12 J4.15 J4.18 J4.21 J4.24 J5.3 J5.6 J5.9 J5.12 J5.15 J5.18 J5.21 J5.24 J7.3 J7.6 J7.9 J7.12 J7.15 J7.18 J7.21 J7.24
N13V0_SCSI: J1.52 J3.26 J4.26 J5.26 J7.26 | length 125.8
  Signal Layer 1 w0.762: v1@89.011,-46.692 v1(89.011,-44.692) ; v1(98.917,-50.915) 103.489,-50.915 v1(104.251,-51.677) ; v1(110.711,-48.908) 111.095,-49.293 J4.26
  BottomLayer w0.203: J1.52 83.718,-45.654 84.915,-46.851 85.825,-46.851
  BottomLayer w0.508: v1@88.91,-44.328 93.603,-44.328 93.967,-44.692 93.989,-44.714
  BottomLayer w0.762: 85.825,-46.851 v1(89.103,-46.851) 94.218,-46.851 97.595,-50.228 97.595,-50.915 ; v1(89.011,-44.692) 93.967,-44.692 95.615,-44.692 96,-44.307 96,-14.335 97.236,-13.099 J7.26 ; J3.26 97.595,-50.915 ; v1(98.917,-50.915) 97.595,-50.915 ; v1(104.251,-51.677) 108.673,-51.677 J4.26 ; v1(110.711,-48.908) 109.25,-47.447 109.25,-14.944 J5.26
P13V0_SCSI: J1.18 J3.25 J4.25 J5.25 J7.25 | length 91.8
  BottomLayer w0.762: J1.18 85.219,-45.7 89.429,-45.7 89.475,-45.654 98.101,-45.654 100.135,-47.688 100.135,-50.534 ; J3.25 100.135,-50.534 ; J7.25 103.265,-13.099 105.14,-14.974 ; J4.25 113.635,-51.282 112.887,-50.534 105.14,-50.534 ; J5.25 113.635,-11.912 112.887,-11.164 109.077,-11.164 105.267,-14.974 105.14,-14.974 ; 100.135,-50.534 105.14,-50.534 ; 105.14,-50.534 105.14,-14.974

## Polygon pours and split planes (outlines as drawn)
GND on Signal Layer 1 "L3-No Net" (solid, remove dead copper, pour order 74): 77.127,-99.012 77.127,0.988 121.936,0.988 121.936,-99.012
no net on Signal Layer 1 "L3-No Net" (solid, remove dead copper, shelved, pour order 8): 278,100.25 310,100.25 309.809,100.059 309.809,0.5 278.25,0.5 278,0.25
GND on BottomLayer "L3-No Net" (solid, remove dead copper, pour order 76): 77.127,-99.012 77.127,0.988 121.936,0.988 121.936,-99.012
no net on BottomLayer "L3-No Net" (solid, remove dead copper, shelved, pour order 16): 278.107,100.5 278.357,100.25 309.857,100.25 309.857,0 310.107,-0.25 309.857,0 278.107,0
N13V0_SCSI on BottomLayer "L3-No Net" (solid, remove dead copper, pour order 72): 112.103,-12.545 112.103,-14.045 111.193,-14.045 110.603,-14.635 110.603,-16.545 110.603,-46.545 111.603,-47.545 111.603,-48.545 111.603,-49.171 111.476,-49.045 108.603,-49.045 108.603,-14.545 109.603,-13.545 110.891,-12.256 111.937,-12.256
N13V0_SCSI on BottomLayer "L3-No Net" (solid, remove dead copper, pour order 70): 98.603,-12.045 98.603,-14.045 98.103,-14.545 97.603,-15.045 96.603,-15.045 96.603,-16.545 96.603,-44.045 96.103,-44.545 95.603,-45.045 94.603,-45.045 88.603,-45.045 88.603,-43.545 95.103,-43.545 95.103,-13.045 96.103,-12.045
GND on TopLayer "L3-No Net" (solid, remove dead copper, pour order 78): 77.127,-99.012 77.127,0.988 121.936,0.988 121.936,-99.012
no net on TopLayer "L3-No Net" (solid, remove dead copper, shelved, pour order 24): 278.25,99.75 309.809,99.75 310.059,100 310.25,99.809 310.25,-0.5 277.75,-0.5
GND on Internal Plane 2 (split plane): 121.401,-98.534 77.613,-98.534 77.613,0.444 121.401,0.444

## Keep-outs
KeepOutLayer:
  lines w0.203: 83.199,-90.942 78.754,-90.942 78.754,-7.122 83.199,-7.122 ; 83.199,-90.942 83.199,-96.022 117.912,-96.022 117.912,-2.042 83.199,-2.042 83.199,-7.122 ; 83.199,-90.942 78.103,-90.942 78.103,-7.122 83.199,-7.122

## Silkscreen, mask and mechanical layers (free items; w line width, h text height)
TopOverlay:
  circle w0.254: c80.659,-93.533 r2.857
  circle w0.254: c80.659,-4.633 r2.857
  text "DAC OUT 16-23" at 107.528,-43.25 h2.03 r90
  text "DAC OUT 24-31" at 94.121,-43.419 h2.03 r90
  text "Zotino - IDC adapter v1.0" at 90.057,-66.533 h2.03 r90
  text "DAC OUT 8-15" at 107.68,-81.519 h2.03 r90
  text "DAC OUT 0-7" at 94.121,-83.297 h2.03 r90
BottomOverlay:
  text "PCB 3U DAC rev1.0" at 91.352,-61.478 h2.03 r270
Mechanical1:
  lines w0.1: 77.103,-99.045 77.103,0.955 121.912,0.955 121.912,-47.045 121.912,-57.045 121.912,-99.045 77.103,-99.045

## Text inside footprints (layer, text, board x,y; h text height)
J1: TopOverlay "36" at 80.968,-67.784 h1 r270; TopOverlay "1" at 82.768,-68.684 h1 r270; TopOverlay "2" at 84.718,-67.784 h1 r270; TopOverlay "35" at 78.818,-68.684 h1 r270; TopOverlay "34" at 84.653,-21.834 h1 r270; TopOverlay "67" at 78.953,-22.934 h1 r270; TopOverlay "68" at 80.703,-22.034 h1 r270; TopOverlay "33" at 82.703,-22.634 h1 r270; Mechanical14 "36" at 80.968,-67.784 h1.02 r270; Mechanical14 "1" at 82.768,-68.684 h1.02 r270; Mechanical14 "2" at 84.718,-67.784 h1.02 r270; Mechanical14 "35" at 78.818,-68.684 h1.02 r270; Mechanical14 "34" at 84.653,-21.834 h1.02 r270; Mechanical14 "67" at 78.953,-22.934 h1.02 r270; Mechanical14 "68" at 80.703,-22.034 h1.02 r270; Mechanical14 "33" at 82.703,-22.634 h1.02 r270; Mechanical8 "PCB Edge" at 76.113,-41.964 h1.2 r270
J3: TopOverlay "26" at 96.198,-54.734 h1.02 r90; Mechanical14 "26" at 96.198,-54.734 h1.02 r90
J4: TopOverlay "26" at 109.698,-54.734 h1.02 r90; Mechanical14 "26" at 109.698,-54.734 h1.02 r90
J5: TopOverlay "26" at 109.698,-13.734 h1.02 r90; Mechanical14 "26" at 109.698,-13.734 h1.02 r90
J7: TopOverlay "26" at 96.198,-13.734 h1.02 r90; Mechanical14 "26" at 96.198,-13.734 h1.02 r90